# EAGLE board proxi-panel (EAGLE 7.7.0)
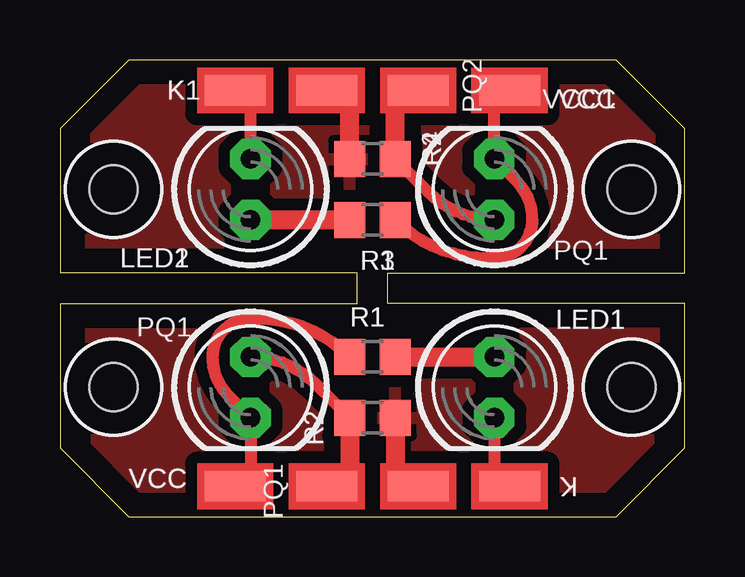
[diagram p0: board, top side]
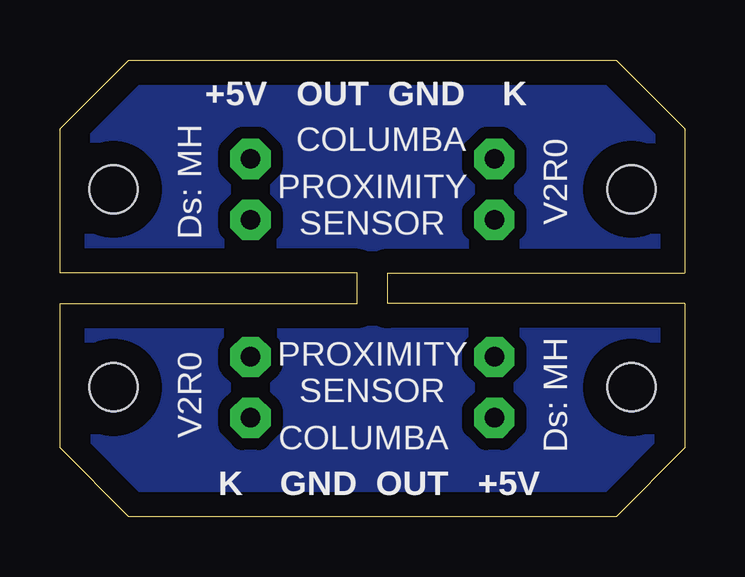
[diagram p1: board, bottom side, seen from below]

Size 26.04 x 19.05 mm. Coordinates in mm from the lower left corner, seen from the top.
Outline: 0.01,8.89 0.01,2.87 2.86,0 23.17,0 26.04,2.87 26.04,8.89 13.65,8.89 13.65,10.16 26.04,10.16
Outline: 26.02,10.16 26.02,16.18 23.18,19.05 2.87,19.05 0,16.18 0,10.16 12.38,10.16 12.38,8.89 0,8.89
Copper layers (1*16): Top 0.035mm / dielectric 1.5mm / Bottom 0.035mm
Design rules "default": minimum track width 10mil, minimum drill 24mil, track to track 8mil, track to pad 8mil, pad to pad 8mil, via to via 8mil, smd to smd 8mil, copper to edge 40mil, drill to drill 8mil, minimum pad ring 10mil, minimum via ring 8mil, stop-mask expansion 4mil, vias tented up to drill 0mil, thermal gap 10mil
Holes 2 mm at 23.81,5.4 2.22,5.4 2.22,13.65 23.81,13.65

## Footprints (pad centres in the part's own frame; a part is rotated, then mirrored left to right if it is on the bottom)
SMD1,27-2,54 = smd 1.27 x 2.54: 1 0,0
LED5MM = drill 0.813 pad 1.676 octagon: A -1.27,0; K 1.27,0
R0805 = smd 1.3 x 1.5: 1 -0.95,0; 2 0.95,0

## Placement (x,y rotation side)
GND  [SMD1,27-2,54]  14.92,1.27 270 top
GND1  [SMD1,27-2,54]  11.11,17.78 90 top
K  [SMD1,27-2,54]  18.73,1.27 90 top
K1  [SMD1,27-2,54]  7.3,17.78 270 top
LED1  [LED5MM]  18.1,5.4 270 top
LED2  [LED5MM]  7.94,13.65 90 top
OUT  [SMD1,27-2,54]  11.11,1.27 270 top
OUT1  [SMD1,27-2,54]  14.92,17.78 90 top
PQ1  PHOTOTRANSISTOR-5MM  [LED5MM]  7.94,5.4 270 top
PQ2  PHOTOTRANSISTOR-5MM  [LED5MM]  18.1,13.65 90 top
R1  300R  [R0805]  13.02,6.67 0 top
R2  1k  [R0805]  13.02,4.13 180 top
R3  300R  [R0805]  13.02,12.38 180 top
R4  1k  [R0805]  13.02,14.92 0 top
VCC  [SMD1,27-2,54]  7.3,1.27 90 top
VCC1  [SMD1,27-2,54]  18.73,17.78 270 top

## Library data of the parts
GND GND1 K K1 OUT OUT1 VCC VCC1 = wirepad
LED1 LED2 = adafruit
PQ1 PQ2 = custom
R1-R4 = resistor

## Nets
GND: GND.1 R2.1
GND1: GND1.1 R4.1
N$1: K.1 LED1.K
N$2: LED2.A R3.2
N$3: K1.1 LED2.K
N$5: LED1.A R1.2
OUT: OUT.1 PQ1.A R2.2
OUT1: OUT1.1 PQ2.A R4.2
VCC: PQ1.K R1.1 VCC.1
VCC1: PQ2.K R3.1 VCC1.1

## Tracks (layer width: path | path; a pad name or v marks a point on that pad's centre or on a via)
GND
  Top 0.8: R2.1 13.97,1.28 arc45 13.97,1.27 GND.1
  pour Bottom (isolate 0.5): 25.4,2.86 25.4,8.26 0.64,8.26 0.64,2.86 2.86,0.64 23.18,0.64
  pour Top (isolate 0.5): 25.4,2.86 25.4,8.26 0.64,8.26 0.64,2.86 2.86,0.64 23.18,0.64
GND1
  Top 0.8: R4.1 12.07,17.77 arc45 12.06,17.78 GND1.1
  pour Bottom (isolate 0.5): 0.64,16.19 0.64,10.79 25.4,10.79 25.4,16.19 23.18,18.41 2.86,18.41
  pour Top (isolate 0.5): 0.64,16.19 0.64,10.79 25.4,10.79 25.4,16.19 23.18,18.41 2.86,18.41
N$1
  Top 0.5: LED1.K 18.1,1.27 K.1
N$2
  Top 0.8: R3.2 LED2.A
N$3
  Top 0.5: LED2.K 7.94,17.78 K1.1
N$5
  Top 0.8: R1.2 LED1.A
OUT
  Top 0.5: PQ1.A arc-45 10.65,5.54 R2.2
  Top 0.8: R2.2 12.07,1.28 arc-45 12.06,1.27 OUT.1
OUT1
  Top 0.5: PQ2.A arc-45 15.38,13.51 R4.2
  Top 0.8: R4.2 13.97,17.77 arc-45 13.97,17.78 OUT1.1
VCC
  Top 0.5: VCC.1 7.94,1.27 PQ1.K 7.02,5.04 arc-45 6.35,6.67 arc-90 7.94,8.26 8.23,8.26 arc-45 R1.1
VCC1
  Top 0.5: VCC1.1 18.1,17.78 PQ2.K 19.01,14.01 arc-45 19.68,12.38 arc-90 18.1,10.79 17.8,10.79 arc-45 R3.1
(copper drawn outside any net)
  shapes: Top area x8

## Text on the board
bNames: K | GND | OUT | +5V | COLUMBA | V2R0 | Ds: MH | PROXIMITY / SENSOR | PROXIMITY / SENSOR | Ds: MH | V2R0 | COLUMBA | +5V | OUT | GND | K
_tNames: VCC | K | R2 | PQ1 | LED1 | R1 | PQ1 | R1 | LED1 | R2 | K | VCC